# Altium PCB Power Converter PCB.PcbDoc
Units mm, origin at the board's own origin, x right, y up, seen from the top; angles counter-clockwise.
Board outline 69.34 x 61.34 mm, 2 copper layers (Top Layer, Bottom Layer), stack 0.533 mm thick; 46 components, 20 nets, 117 pads, 16 vias.
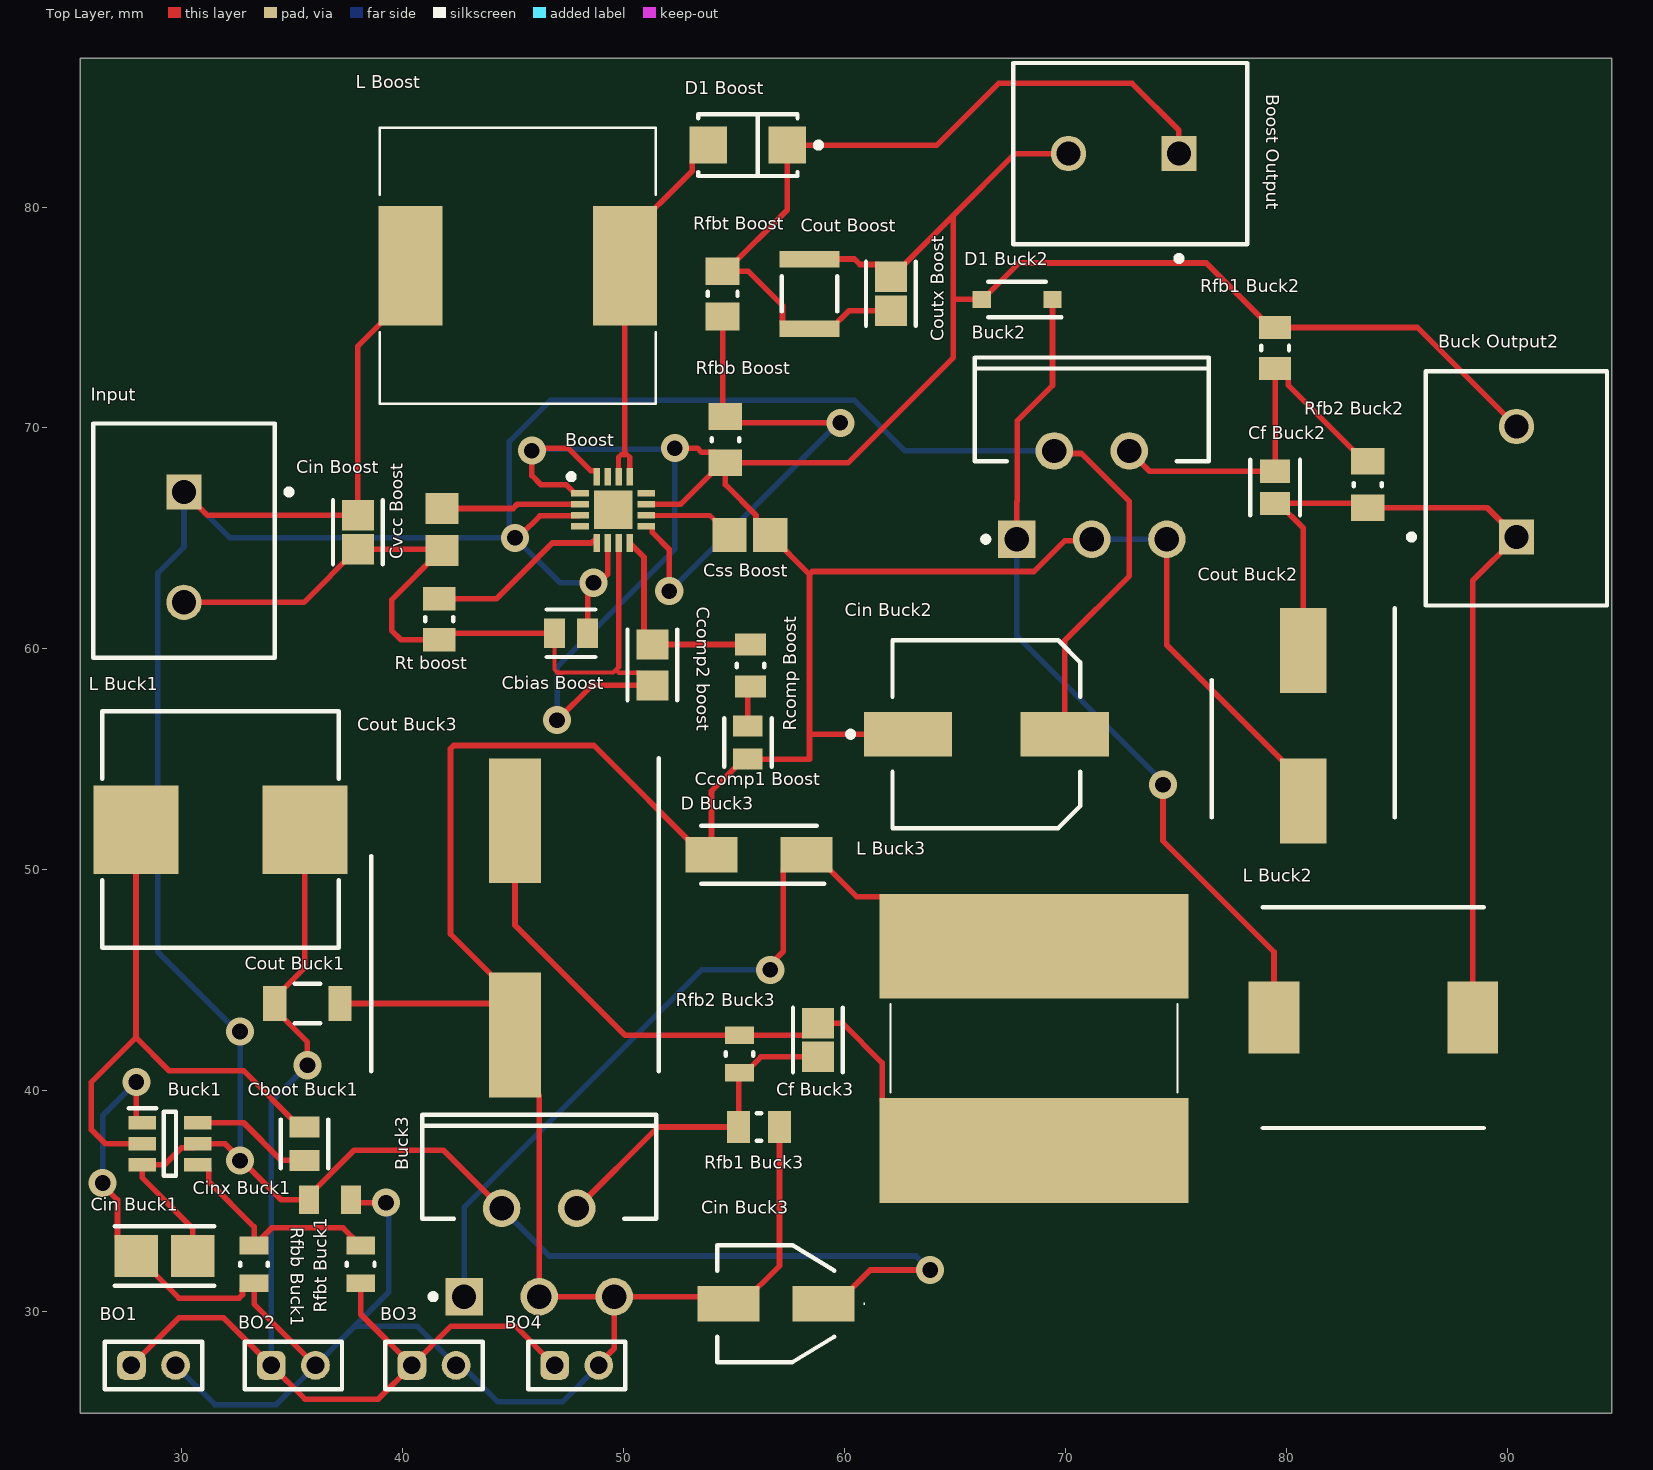
[diagram p0: Top Layer view]
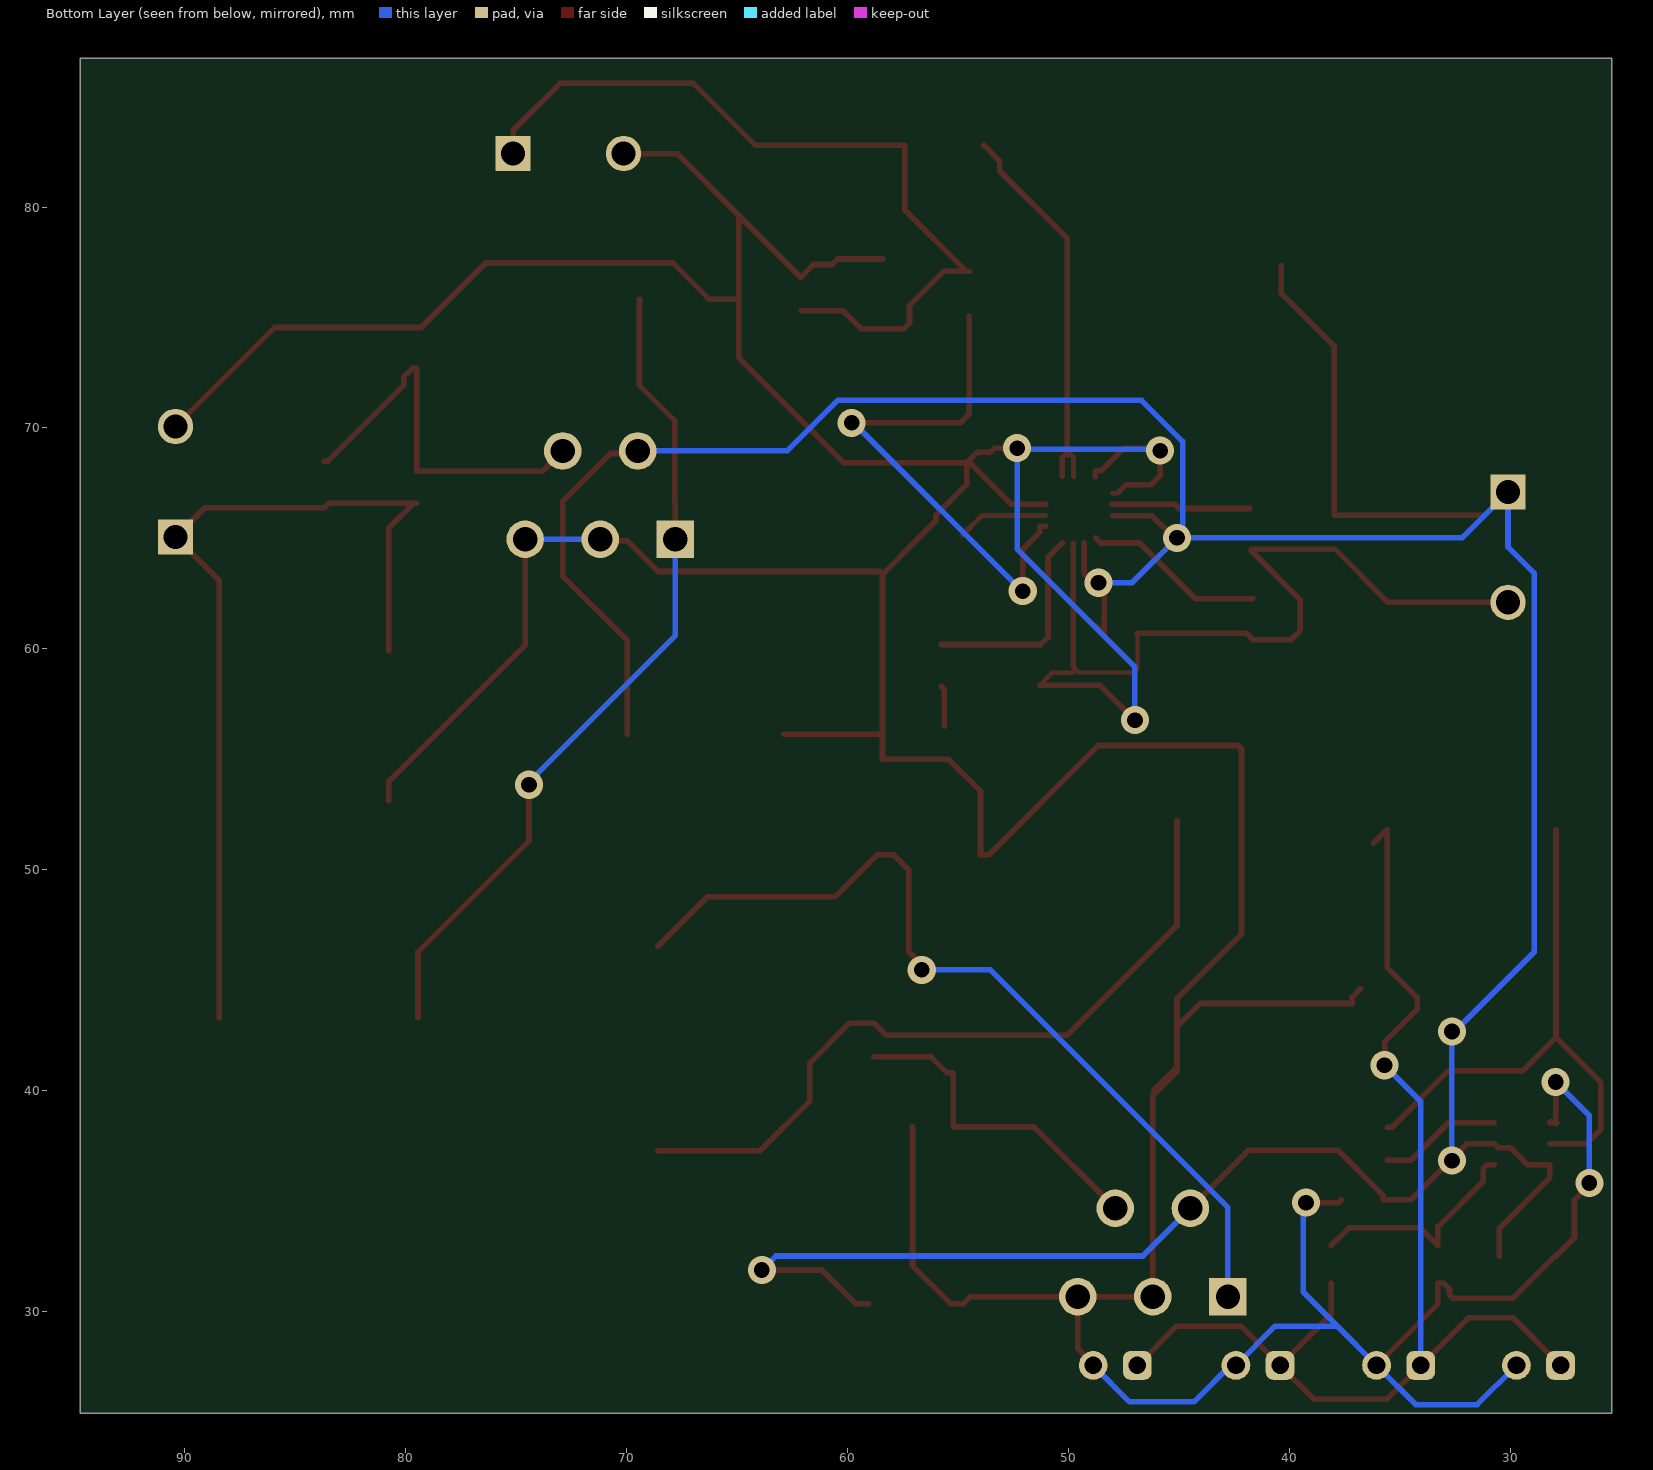
[diagram p1: Bottom Layer view, seen from below]
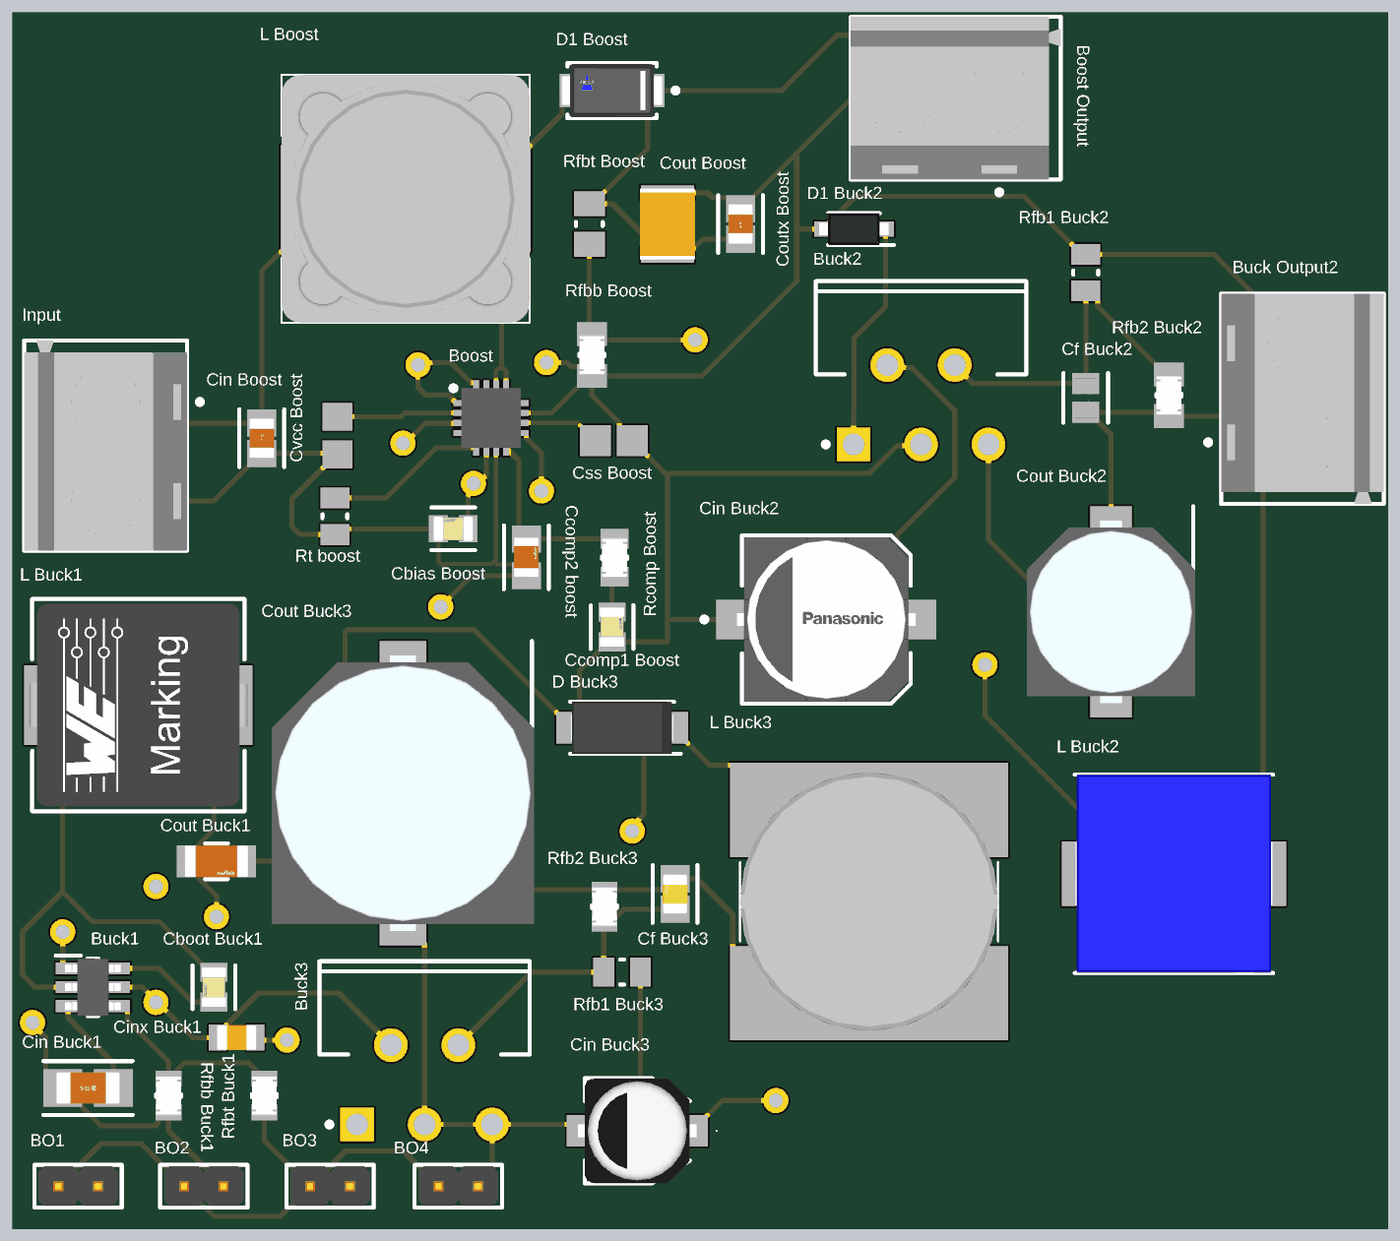
[diagram p2: 3D render of the assembled board from above, using the file's embedded part models]

## Layer stack, top to bottom
Top Solder: solder mask 0.0102, Solder Resist, Dk 3.5
Top Layer: signal copper 0.0356
Dielectric 2: prepreg 0.0711, PP-006, Dk 4.1
Dielectric 1: dielectric 0.32, FR-4, Dk 4.8
Dielectric 3: prepreg 0.0711, PP-006, Dk 4.1
Bottom Layer: signal copper 0.0356
Bottom Solder: solder mask 0.0102, Solder Resist, Dk 3.5

## Board outline
25.4,25.4 94.742,25.4 94.742,86.741 25.4,86.741

## Design rules (kind name [scope] priority, off if disabled: settings)
Clearance [All] p1: gap=0.254 ignorepadtopadclearanceinfootprint=FALSE except(0: Arc-Hole Track-Hole SMDPad-Hole THPad-Hole Via-Hole Fill-Hole Poly-Hole Region-Hole Text-Hole; 0.13: Arc-SMDPad Track-SMDPad SMDPad-SMDPad)
PolygonConnect [All] p1: connectstyle=Relief reliefconductorwidth=0.254 reliefentries=4 polygonreliefangle="90 Angle" airgapwidth=0.254
RoutingVias [All] p1: holewidth=0.711 width=1.27 viastyle="Through Hole" minholewidth=0.711 minwidth=1.27 maxholewidth=0.711 maxwidth=1.27
SolderMaskExpansion [All] p1: expansion=0.102 istentingtop=FALSE
Width [All] p1: maxlimit=0.254 minlimit=0.2 preferedwidth=0.254
30 further rules are at their usual default settings.

## Components (designator, comment, footprint, x,y, rotation, side; value= is the part's Value field where it differs from the comment)
BO1 "62000211121" 62000211121 28.718,27.559 r0 top
BO2 "62000211121" 62000211121 35.052,27.559 r0 top
BO3 "62000211121" 62000211121 41.418,27.559 r0 top
BO4 "62000211121" 62000211121 47.879,27.559 r0 top
Boost "LM5158RTER" QFN50P300X300X80-17N-D 49.53,66.294 r0 top
"Boost Output" "282836-2" TECO-282836-2_V 72.644,82.423 r180 top
Buck1 "LMR51420XFDDCR" SOT95P280X110-6N 29.464,37.592 r0 top
Buck2 "" NDH0005A 71.198,66.961 r0 top
Buck3 "" NDH0005A 46.179,32.671 r0 top
"Buck Output2" "282836-2" TECO-282836-2_V 90.424,67.564 r90 top
"Cbias Boost" "C0805C104M5RACTU" FP-C0805C-DN-MFG 47.625,60.706 r0 top value="0.10 μF"
"Cboot Buck1" "C0805C104K3RACTU" FP-C0805C-DN-MFG 35.56,37.592 r90 top value="0.10 μF"
"Ccomp1 Boost" "C0805C223K5RACTU" FP-C0805C-DN-MFG 55.626,55.753 r270 top value="22,000 pF"
"Ccomp2 boost" "GRM2165C2A222JA01D" FP-GRM216-0_1-IPC_A 51.308,59.271 r90 top
"Cf Buck2" "CL21C222JBFNNNE" FP-CL21-IPC_C 79.502,67.31 r270 top
"Cf Buck3" "C2012C0G1H122J060AA" FP-C2012-060-0_2-IPC_B 58.801,42.291 r90 top
"Cin Boost" "C2012X5R1H475K125AB" FP-C2012-125-0_2-IPC_B 37.973,65.276 r270 top
"Cin Buck1" "C3216X7R1H335K160AC" FP-C3216-160-0_2-IPC_A 29.216,32.512 r180 top
"Cin Buck2" "EEE-FK1H101GP" FP-FKF-MFG 66.427,56.134 r0 top
"Cin Buck3" "EEH-ZA1H100R" EEHZA1H100R 56.896,30.353 r180 top
"Cinx Buck1" "885012207098" WCAP-CSGP_0805_L2W1.25H0.8_Reflow 36.703,35.052 r180 top
"Cout Boost" "C3225X7R2A225K230AB" CAPC3225X250X20LL40 58.42,76.073 r270 top
"Cout Buck1" "GRM31CR61A476KE15L" FP-GRM31C-0_2-e0_3_0_8-MFG 35.687,43.942 r0 top
"Cout Buck2" "EMVH100ADA221MHA0G" CAPAE830X1050N 80.772,56.515 r270 top
"Cout Buck3" "EMVH500ARA221MKE0S" CAPAE1300X1400N 45.085,47.371 r270 top
"Coutx Boost" "C2012X7R2A104K125AA" FP-C2012-125-0_2-IPC_B 62.103,76.073 r90 top
"Css Boost" "08055C123KAT2A" CAPC2013X94X50ML20T25 55.717,65.151 r0 top
"Cvcc Boost" "GRM21BR71C225KA12L" CAPC2013X135X50ML10T20 41.783,65.405 r90 top
"D1 Boost" "VS-10MQ100NTRPBF" FP-95400-MFG 55.626,82.804 r180 top value=38pF
"D1 Buck2" "PMEG6010CEH,115" SODFL3516X120N 67.818,75.819 r180 top
"D Buck3" "SK220ATR" DIOM5226X295N 56.134,50.673 r180 top
Input "282836-2" TECO-282836-2_V 30.099,64.603 r270 top
"L Boost" "SRR1260-120M" SRR1260120M 45.212,77.343 r0 top
"L Buck1" "7443251000" WE-HCI_1050 31.75,51.816 r90 top
"L Buck2" "SRU1048-331Y" INDPM100100X510N 83.947,43.307 r0 top
"L Buck3" "SDR1307-121KL" SDR1307102KL 68.58,41.91 r180 top
"Rcomp Boost" "CRCW0805887RFKEA" FP-CRCW0805-e3-IPC_B 55.753,59.247 r270 top
"Rfb1 Buck2" "CRCW08051K00FKEA" RESC2013X50X30NL20T20 79.502,73.624 r270 top
"Rfb1 Buck3" "CRCW08051K00FKEA" RESC2013X50X30NL20T20 56.134,38.354 r180 top
"Rfb2 Buck2" "CRCW08051K69FKEA" FP-CRCW0805-e3-IPC_A 83.693,67.437 r270 top
"Rfb2 Buck3" "CRCW08053K09FKEA" FP-CRCW0805-e3-IPC_C 55.245,41.656 r90 top
"Rfbb Boost" "CRCW08052K49FKEA" FP-CRCW0805-e3-IPC_A 54.61,69.469 r270 top
"Rfbb Buck1" "CRCW080522K1FKEA" FP-CRCW0805-e3-IPC_C 33.274,32.131 r270 top
"Rfbt Boost" "CRCW0805118KFKEA" RESC2013X50X30ML20T20 54.483,76.073 r270 top
"Rfbt Buck1" "CRCW0805162KFKEA" FP-CRCW0805-e3-IPC_C 38.1,32.131 r90 top
"Rt boost" "CRCW08059K76FKEA" RESC2013X50X30NL20T20 41.656,61.341 r270 top

## Footprints (in the part's own frame and the unit in brackets; to place one, negate y for a bottom-side part, rotate by r counter-clockwise, add the part's x,y. Pads: shape width x height; smd on the part's side, far side on the other; paste and mask are expansions set on the pad)
62000211121 [mm] "Pin Header, pitch 2.00 mm, THT, Vertical, single row, 2p"
  rrect50% 1.3x1.3 hole 0.8: 1(-1,0)
  round 1.3 hole 0.8: 2(1,0)
  silkscreen extent -2.2,-1.07 2.2,1.07, body extent -2,-1 2,1, height 6.05
CAPAE830X1050N [mm]
  rect 3.85x2.1 smd: 1(-3.4,0) 2(3.4,0)
  silkscreen extent -5.33,-4.15 4.15,4.15, body extent -4.6,-4.25 4.6,4.25, height 10.5
CAPAE1300X1400N [mm]
  rect 5.65x2.35 smd: 1(-4.85,0) 2(4.85,0)
  silkscreen extent -7.68,-6.5 6.5,6.5, body extent -6.95,-6.6 6.95,6.6, height 14
CAPC2013X94X50ML20T25 [mm] "Chip Capacitor, 2-Leads, Body 2.01x1.25mm, IPC Low Density"
  rect 1.55x1.55 smd: 1(-0.925,0) 2(0.925,0)
  body extent -1.1,-0.72 1.11,0.72, height 0.94
CAPC2013X135X50ML10T20 [mm] "Chip Capacitor, 2-Leads, Body 2.00x1.25mm, IPC Low Density"
  rect 1.4x1.5 smd: 1(-0.95,0) 2(0.95,0)
  body extent -1.05,-0.67 1.05,0.67, height 1.35
CAPC3225X250X20LL40 [mm] "Chip Capacitor, 2-Leads, Body 3.60x2.80mm, IPC High Density"
  rect 0.75x2.7 smd: 1(-1.575,0) 2(1.575,0)
  silkscreen extent -0.8,-1.25 0.8,1.25, body extent -1.8,-1.4 1.8,1.4, height 2.5
DIOM5226X295N [mm]
  rect 2.35x1.6 smd: 1(-2.15,0) 2(2.15,0)
  silkscreen extent -2.95,-1.31 2.61,1.31, body extent -2.62,-1.31 2.62,1.31, height 2.95
EEHZA1H100R [mm]
  rect 2.8x1.6 smd: 1(-2.15,0) 2(2.15,0)
  silkscreen extent -4.03,-2.65 2.65,2.65, body extent -3,-2.65 3,2.65, height 5.8
FP-95400-MFG [mm]
  rect 1.7x1.68 smd paste+0 mask+0: 1(-1.79,0) 2(1.79,0)
  silkscreen extent -3.33,-1.4 2.25,1.4, body extent -2.74,-1.5 2.74,1.5, height 0.25
FP-C0805C-DN-MFG [mm]
  rect 0.95x1.35 smd paste+0 mask+0: 1(-0.75,0) 2(0.75,0)
  silkscreen extent -1.1,-1.07 1.1,1.07, body extent -1.4,-0.85 1.4,0.85, height 0.25
FP-C2012-060-0_2-IPC_B [mm]
  rect 1.378x1.456 smd paste+0 mask+0: 1(-0.764,0) 2(0.764,0)
  silkscreen extent -1.45,-1.13 1.45,1.13, body extent -1.7,-0.98 1.7,0.98, height 0.25
FP-C2012-125-0_2-IPC_B [mm]
  rect 1.378x1.456 smd paste+0 mask+0: 1(-0.764,0) 2(0.764,0)
  silkscreen extent -1.45,-1.13 1.45,1.13, body extent -1.7,-0.98 1.7,0.98, height 0.25
FP-C3216-160-0_2-IPC_A [mm]
  rect 1.954x1.906 smd paste+0 mask+0: 1(-1.276,0) 2(1.276,0)
  silkscreen extent -2.25,-1.35 2.25,1.35, body extent -2.75,-1.45 2.75,1.45, height 0.25
FP-CL21-IPC_C [mm]
  rect 1.055x1.356 smd paste+0 mask+0: 1(-0.726,0) 2(0.726,0)
  silkscreen extent -1.25,-1.12 1.25,1.12, body extent -1.35,-0.82 1.35,0.82, height 0.25
FP-CRCW0805-e3-IPC_A [mil]
  rect 47.5x59.38 smd paste+0 mask+0: 1(-41.37,0) 2(41.37,0)
  silkscreen extent -3,-25 3,25, body extent -85,-49 85,49, height 10
FP-CRCW0805-e3-IPC_B [mm]
  rect 1.007x1.408 smd paste+0 mask+0: 1(-0.951,0) 2(0.951,0)
  silkscreen extent -0.07,-0.62 0.07,0.62, body extent -1.7,-0.95 1.7,0.95, height 0.25
FP-CRCW0805-e3-IPC_C [mil]
  rect 31.75x51.5 smd paste+0 mask+0: 1(-33.5,0) 2(33.5,0)
  silkscreen extent -3,-25 3,25, body extent -53,-31 53,31, height 10
FP-FKF-MFG [mm]
  rect 4x2 smd paste+0 mask+0: 1(-3.55,0) 2(3.55,0)
  silkscreen extent -6.27,-4.25 4.25,4.25, body extent -5.8,-4.5 5.8,4.5, height 0.25
FP-GRM31C-0_2-e0_3_0_8-MFG [mm]
  rect 1.05x1.6 smd paste+0 mask+0: 1(-1.475,0) 2(1.475,0)
  silkscreen extent -0.58,-0.9 0.58,0.9, body extent -2.1,-1 2.1,1, height 0.25
FP-GRM216-0_1-IPC_A [mm]
  rect 1.358x1.461 smd paste+0 mask+0: 1(-0.927,0) 2(0.927,0)
  silkscreen extent -1.61,-1.13 1.61,1.13, body extent -2.11,-1.23 2.11,1.23, height 0.25
INDPM100100X510N [mm]
  rect 2.3x3.25 smd: 1(-4.5,0) 2(4.5,0)
  silkscreen extent -5,-5 5,5, body extent -5,-5 5,5, height 5.1
NDH0005A [mm] "FM, 5-Leads, Body 10.6x4.7mm, Pitch 1.7mm"
  rect 1.7x1.7 hole 1.1: 1(-3.4,-2)
  round 1.7 hole 1.1: 2(-1.7,2) 3(0,-2) 4(1.7,2) 5(3.4,-2)
  silkscreen extent -5.3,-2.12 5.3,6.23, body extent -5.35,-2.31 5.35,6.28, height 21.1
QFN50P300X300X80-17N-D [mm]
  rect 0.8x0.3 smd: 1(-1.5,0.75) 2(-1.5,0.25) 3(-1.5,-0.25) 4(-1.5,-0.75) 9(1.5,-0.75) 10(1.5,-0.25) 11(1.5,0.25) 12(1.5,0.75)
  rect 0.3x0.8 smd: 5(-0.75,-1.5) 6(-0.25,-1.5) 7(0.25,-1.5) 8(0.75,-1.5) 13(0.75,1.5) 14(0.25,1.5) 15(-0.25,1.5) 16(-0.75,1.5)
  rect 1.75x1.75 smd: 17(0,0)
  silkscreen extent -2.02,1.38 -1.77,1.62, body extent -1.5,-1.5 1.5,1.5, height 0.8
RESC2013X50X30ML20T20 [mm] "Chip Resistor, 2-Leads, Body 2.00x1.25mm, IPC Low Density"
  rect 1.25x1.55 smd: 1(-1.025,0) 2(1.025,0)
  silkscreen extent -0.1,-0.67 0.1,0.67, body extent -1.1,-0.72 1.1,0.72, height 0.5
RESC2013X50X30NL20T20 [mm] "Chip Resistor, 2-Leads, Body 2.00x1.25mm, IPC Medium Density"
  rect 1.05x1.45 smd: 1(-0.925,0) 2(0.925,0)
  silkscreen extent -0.1,-0.63 0.1,0.63, body extent -1.1,-0.72 1.1,0.72, height 0.5
SDR1307102KL [mm]
  rect 14x4.75 smd: 1(0,-4.625) 2(0,4.625)
  silkscreen extent -6.5,-2 6.5,2, body extent -6.5,-6.5 6.5,6.5, height 7
SODFL3516X120N [mm]
  rect 0.82x0.76 smd: 1(-1.6,0) 2(1.6,0)
  silkscreen extent -2.01,-0.8 1.3,0.8, body extent -1.75,-0.8 1.75,0.8, height 1.1
SOT95P280X110-6N [mm]
  rect 1.25x0.6 smd: 1(-1.25,0.95) 2(-1.25,0) 3(-1.25,-0.95) 4(1.25,-0.95) 5(1.25,0) 6(1.25,0.95)
  silkscreen extent -1.87,-1.45 0.27,1.6, body extent -1.4,-1.45 1.4,1.45, height 0.97
SRR1260120M [mm]
  rect 2.9x5.4 smd: 1(-4.85,0) 2(4.85,0)
  silkscreen extent -6.25,-6.25 6.25,6.25, body extent -6.25,-6.25 6.25,6.25, height 6
TECO-282836-2_V [mm] "Female Header, Pitch 5mm, 1 x 2 Position, Height 10mm"
  rect 1.6x1.6 hole 1.1: 1(-2.5,0)
  round 1.6 hole 1.1: 2(2.5,0)
  silkscreen extent -5.6,-4.1 5,4.87, body extent -5.6,-4.1 5,4.1, height 10
WCAP-CSGP_0805_L2W1.25H0.8_Reflow [mm] "Ceramic Capacitors, body 2x1.25mm"
  rect 0.9x1.3 smd: 1(-0.95,0) 2(0.95,0)
  body extent -1,-0.62 1,0.63, height 0.8
WE-HCI_1050 [mm] "SMT Flat Wire High Current Inductor, body 10.2x10.2mm"
  rect 4x3.85 smd: 1(0,3.825) 2(0,-3.825)
  silkscreen extent -5.35,-5.35 5.35,5.35, body extent -5.1,-5.5 5.1,5.5, height 5

## Part data
BO1 BO2 BO3 BO4: library part CMP-1502-00956-3, Contact Resistance=20mΩ, Current Rating=2A, Max Operating Temperature=105°C, Min Operating Temperature=-40°C, Operating Supply Voltage=200V, Contact Material=Gold, Gender=Male, Height=6.35mm, Lead Pitch=2mm, NexarPartId=61924778, Number of Contacts=2, Number of Pins=2, Number of Rows=1, Orientation=Vertical, RoHS=Non-Compliant, Voltage Rating=200V
Boost: "Integrated Circuit", Manufacturer_Name="Texas Instruments", Mouser Part Number=595-LM5158RTER, Arrow Part Number=LM5158RTER, Arrow Price/Stock=https://www.arrow.com/en/products/lm5158rter/texas-instruments?region=nac, Datasheet Link=https://www.ti.com/lit/ds/symlink/lm51581.pdf?HQS=dis-dk-null-digikeymode-dsf-pf-null-wwe&ts=1701945457348, Height=0.8mm, Manufacturer_Part_Number=LM5158RTER, Mouser Price/Stock=https://www.mouser.co.uk/ProductDetail/Texas-Instruments/LM5158RTER?qs=A6eO%252BMLsxmSi4gKDMJ7mCQ%3D%3D
"Boost Output" "Buck Output2" Input: library part CMP-1684-00017-1, "Female Header, Pitch 5 mm, 1 x 2 Position, Height 10 mm, Tail Length 3.5 mm, Rohs, Bulk", Color=Green, Current=13.5A, Manufacturer="TE Connectivity", Package Description="Female Header, Pitch 5 mm, 1 x 2 Position, Height 10 mm, Tail Length 3.5 mm", Package Reference=THD, Standard Package=300, Voltage=300V, 3D Model=282836-2.pdf, Category=Connectors,Interconnects, Clamp Material - Plating=Brass-NickelPlated, Contact Material - Plating=Brass-TinPlated, Datasheet URL=http://www.te.com.cn/commerce/DocumentDelivery/DDEController?Action=showdoc&DocId=Catalog+Section%7F1308389_EUROSTYLE_TERMINAL_BLOCKS%7F0607%7Fpdf%7FEnglish%7FENG_CS_1308389_EUROSTYLE_TERMINAL_BLOCKS_0607.pdf%7F282836-2, Dynamic Catalog=BuchananSeries, Family=TerminalBlocks-WiretoBoard, Featured Product=EurostyleTerminalBlockConnectors, Features=Interlocking(Side), Housing Material=Polyamide(PA66),Nylon6/6, Manufacturer URL=http://www.te.com, Mating Orientation=HorizontalwithBoard, Mounting Type=ThroughHole, Number of Levels=1, Other Names="5ULV-02B / A98076", Packaging=Bulk, Pitch="0.197\"(5.00mm)", Positions Per Level=2, Product Training Modules=Wire-to-BoardEurostyleTerminalBlocks, RoHS Information=282836-2StatementofCompliance, Screw Material - Plating=Brass-NickelPlated, Screw Thread=M3, Series=Buchanan, Torque - Screw=0.68Nm(6Lb-In), Wire Gauge=16-30AWG, Wire Termination=Screw-RisingCageClamp
Buck1: "Integrated Circuit", Manufacturer_Name="Texas Instruments", Mouser Part Number=595-LMR51420XFDDCR, Arrow Part Number=LMR51420XFDDCR, Arrow Price/Stock=https://www.arrow.com/en/products/lmr51420xfddcr/texas-instruments?region=nac, Datasheet Link=https://www.ti.com/lit/ds/symlink/lmr51420.pdf?ts=1662461097045&ref_url=https%253A%252F%252Fwww.ti.com%252Fproduct%252FLMR51420%252Fpart-details%252FLMR51420XFDDCR, Height=1.1mm, Manufacturer_Part_Number=LMR51420XFDDCR, Mouser Price/Stock=https://www.mouser.co.uk/ProductDetail/Texas-Instruments/LMR51420XFDDCR?qs=vvQtp7zwQdMiXKT41134nA%3D%3D
Buck2 Buck3: library part CMP-0069-01920-3, "SIMPLE SWITCHER® Power Converter 150 KHz 1A Step-Down Voltage Regulator, 5-pin TO-220, Pb-Free", Manufacturer="Texas Instruments", PackageTopMarking="NSUZXYTTE#*LM2595T*-ADJ P+", PowerWise=N, ComponentLink1Description="Datasheet URL", ComponentLink1URL=http://www.ti.com/general/docs/lit/getliterature.tsp?genericPartNumber=LM2595&fileType=pdf, CompType=Switcher, PackageDescription="TO-220, Molded, Stagger Bend, 5 Lead", PackageReference=NDH0005A, PinCount=5, RoHS=Y
"Cbias Boost": library part CMP-1036-04423-3, "CAP CER 0.1UF 50V X7R 0805", Capacitance="0.10 μF", Manufacturer=KEMET, Package=C0805C-DN, Temperature="-55°C to +125°C", Temperature Characteristic=X7R, Temperature Coefficient=30ppm/°C, Temperature Range High=+125°C, Temperature Range Low=-55°C, Tolerance=0.2, Voltage Rating="50 V", Automotive=No, Category=Cap, ComponentLink2Description=Datasheet, ComponentLink2URL=https://content.kemet.com/datasheets/KEM_C1003_C0G_SMD.pdf, Device Class L1="Passive Components", Device Class L2=Capacitors, Device Class L3="Ceramic Capacitors", Digikey Description="CAP CER 0.1UF 50V X7R 0805", Height=0.88mm, Ipc Land Pattern Name=CAPC200125X78, Lead Free=Yes, Manufacturer Part Number=C0805C104M5RACTU, Material=Ceramic, Mouser Description="Multilayer Ceramic Capacitors MLCC - SMD/SMT 50volts 0.1uF X7R 20%", Octopart=https://octopart.com/c0805c104m5ractu-kemet-129379, RoHS=TRUE
"Cboot Buck1": library part CMP-2007-01100-2, "CAP CER 0.1UF 25V X7R 0805", Capacitance="0.10 μF", Manufacturer=KEMET, Package=C0805C-DN, Temperature="-55°C to +125°C", Temperature Characteristic=X7R, Temperature Coefficient=30ppm/°C, Temperature Range High=+125°C, Temperature Range Low=-55°C, Tolerance=0.1, Voltage Rating="25 V", Automotive=No, Category=Cap, ComponentLink2Description=Datasheet, ComponentLink2URL=https://content.kemet.com/datasheets/KEM_C1003_C0G_SMD.pdf, Device Class L1="Passive Components", Device Class L2=Capacitors, Device Class L3="Ceramic Capacitors", Digikey Description="CAP CER 0.1UF 25V X7R 0805", Height=0.88mm, Ipc Land Pattern Name=CAPC200125X78, Lead Free=Yes, Manufacturer Part Number=C0805C104K3RACTU, Material=Ceramic, Mouser Description="Multilayer Ceramic Capacitor, C Series, 0.1 - F, - 10%, X7R, 25 V, 0805 [2012 Metric] Rohs Compliant: Yes", Octopart=https://octopart.com/c0805c104k3ractu-kemet-136827, RoHS=TRUE
"Ccomp1 Boost": library part CMP-2007-00338-2, "CAP CER 0.022UF 50V X7R 0805", Capacitance="22,000 pF", Manufacturer=KEMET, Package=C0805C-DN, Temperature="-55°C to +125°C", Temperature Characteristic=X7R, Temperature Coefficient=30ppm/°C, Temperature Range High=+125°C, Temperature Range Low=-55°C, Tolerance=0.1, Voltage Rating="50 V", Automotive=No, Category=Cap, ComponentLink2Description=Datasheet, ComponentLink2URL=https://content.kemet.com/datasheets/KEM_C1003_C0G_SMD.pdf, Device Class L1="Passive Components", Device Class L2=Capacitors, Device Class L3="Ceramic Capacitors", Digikey Description="CAP CER 0.022UF 50V X7R 0805", Height=0.88mm, Ipc Land Pattern Name=CAPC200125X78, Lead Free=Yes, Manufacturer Part Number=C0805C223K5RACTU, Material=Ceramic, Mouser Description="Capacitor; Ceramic; Cap; .022uF; Tol 10%; SMT; Vol-Rtg 50V; X7R; Tape and Reel", Octopart=https://octopart.com/c0805c223k5ractu-kemet-145968, RoHS=TRUE
"Ccomp2 boost": library part CMP-1036-03272-5, "Chip Multilayer Ceramic Capacitors for General Purpose, 0805, 2200pF, C0G, 30ppm/°C, 5%, 100V", Capacitance=2.2nF, Case Code (Imperial)=0805, Case Code (Metric)=2012, Dielectric=C0G, Max Operating Temperature=125°C, Min Operating Temperature=-55°C, Package Quantity=4000, Tolerance=5%, Voltage Rating=100V, Case/Package=0805, Construction=Flat, Depth=1.25mm, Height=0.6mm, Length=2mm, Mount="Surface Mount", Packaging="Tape and Reel", Radiation Hardening=No, RoHS Compliant=Yes, Series=GRM, Termination=SMD/SMT, Thickness=0.028inch, Voltage Rating (DC)=100V, Width=0.049inch
"Cf Buck2": library part CMP-13271-001564-1, "CL21 Series 0805 2.2nF 50V ±5% Tolerance C0G Multilayer Ceramic Chip Capacitor", Capacitance=2.2nF, Case Code (Imperial)=0805, Case Code (Metric)=2012, Dielectric=C0G, Max Operating Temperature=125°C, Min Operating Temperature=-55°C, Package Quantity=2000, Tolerance=5%, Voltage=50V, Case/Package=0805, Depth=1.25mm, Height=1.25mm, Lead Free="Lead Free", Length=2mm, Mount="Surface Mount", Packaging="Tape and Reel", Radiation Hardening=No, Thickness=0.053inch, Voltage Rating=50V, Voltage Rating (DC)=50V, Width=0.049inch
"Cf Buck3": library part CMP-08246-006887-1, "Multilayer Ceramic Capacitors 1.2nF ±5% 50V C0G SMD 0805", Capacitance=1.2nF, Case Code (Imperial)=0805, Case Code (Metric)=2012, Dielectric=C0G, Dielectric Material=Ceramic, Max Operating Temperature=125°C, Min Operating Temperature=-55°C, Package Quantity=1, Temperature Coefficient=30ppm/°C, Tolerance=5%, Voltage=50V, Case/Package=0805, Construction=Flat, Depth=1.25mm, Height=0.6mm, Lead Free="Lead Free", Length=2mm, Mount="Surface Mount", Packaging="Tape and Reel", Radiation Hardening=No, REACH SVHC="No SVHC", RoHS Compliant=Yes, Series=C, Termination=SMD/SMT, Thickness=0.028inch, Voltage Rating=50V, Voltage Rating (DC)=50V, Weight=0.000194oz, Width=0.049inch
"Cin Boost": library part CMP-08246-000007-2, "Multilayer Ceramic Capacitors 4.7μF ±10% 50V X5R SMD 0805", Capacitance=4.7uF, Case Code (Imperial)=0805, Case Code (Metric)=2012, Dielectric=X5R, Dielectric Material=Ceramic, Max Operating Temperature=85°C, Min Operating Temperature=-55°C, Package Quantity=1, Tolerance=10%, Voltage=50V, Case/Package=0805, Construction=Flat, Depth=1.25mm, Height=1.25mm, Lead Free="Lead Free", Length=2mm, Mount="Surface Mount", Packaging="Tape and Reel", Radiation Hardening=No, REACH SVHC="No SVHC", Resistor Type=Ceramic, Series=C, Termination=SMD/SMT, Thickness=0.057inch, Voltage Rating=50V, Voltage Rating (DC)=50V, Weight=0.000194oz, Width=0.049inch
"Cin Buck1": library part CMP-08246-006965-1, "Multilayer Ceramic Capacitors 3.3uF ±10% 50V X7R SMD 1206", Capacitance=3.3uF, Case Code (Imperial)=1206, Case Code (Metric)=3216, Dielectric=X7R, Dielectric Material=Ceramic, Max Operating Temperature=125°C, Min Operating Temperature=-55°C, Package Quantity=1, Tolerance=10%, Voltage Rating=50V, Case/Package=1206, Construction=Flat, Depth=1.6mm, Height=1.6mm, Lead Free="Lead Free", Length=3.2mm, Mount="Surface Mount", Packaging="Tape and Reel", Radiation Hardening=No, REACH SVHC="No SVHC", Resistor Type=Ceramic, RoHS Compliant=Yes, Series=C, Termination=SMD/SMT, Thickness=0.051inch, Voltage Rating (DC)=50V, Weight=0.000571oz, Width=1.6mm
"Cin Buck2": library part CMP-05427-000032-1, "CAP ALUM 100UF 20% 50V SMD", Capacitance=100uF, Case/Package=SMD/SMT, ESR (Equivalent Series Resistance)=340mR, Leakage Current=10mA, Max Operating Temperature=105°C, Min Operating Temperature=-55°C, Package Quantity=1, Ripple Current=350mA, Tolerance=20%, Voltage=50V, Construction=Cylindrical, Contact Plating=Tin, Diameter=8mm, Height=10.2mm, Height - Seated (Max)=0.402inch, Impedance=340mR, Lead Free="Lead Free", Length=10.2mm, Life (Hours)=5000Hour, Mount="Surface Mount", Number of Pins=2, Packaging="Tape and Reel", Radiation Hardening=No, REACH SVHC="No SVHC", Ripple Current (AC)=350mA, RoHS Compliant=Yes, Series=FK, Termination=SMD/SMT, Voltage Rating=50V, Voltage Rating (DC)=50V, Width=10mm
"Cin Buck3": "Capacitor Polarised", Manufacturer_Name=Panasonic, Mouser Part Number=667-EEH-ZA1H100R, Arrow Part Number=EEH-ZA1H100R, Arrow Price/Stock=https://www.arrow.com/en/products/eehza1h100r/panasonic, Datasheet Link=http://industrial.panasonic.com/cdbs/www-data/pdf/RDD0000/ABA0000C1221.pdf, Height=6.1mm, Manufacturer_Part_Number=EEH-ZA1H100R, Mouser Price/Stock=https://www.mouser.co.uk/ProductDetail/Panasonic/EEH-ZA1H100R?qs=7UCyOFMWVHYLkHnrAgGq6g%3D%3D
"Cinx Buck1": library part CMP-03913-65419869-1, "885012207098 Ceramic Capacitor, Multilayer, Ceramic, 50V, 10% +Tol, 10% -Tol, X7R, 15% TC, 0.1uF, Surface Mount, 0805", Capacitance=100nF, Case Code (Imperial)=0805, Case Code (Metric)=2012, Dielectric=X7R, Insulation Resistance=5GΩ, Max Operating Temperature=125°C, Min Operating Temperature=-55°C, Tolerance=10%, Voltage Rating=50V, Case/Package=0805, Height=800µm, Length=2mm, Material=Ceramic, Mount="Surface Mount", NexarPartId=65419869, Packaging="Tape & Reel (TR)", REACH SVHC=Unknown, RoHS=Compliant, Thickness=889µm, Voltage Rating (DC)=50V, Width=1.25mm
"Cout Boost": library part CMP-2000-06053-1, "Chip Capacitor, 2.2 uF, +/- 10%, -55 to 125 degC, 1210 (3225 Metric), RoHS, Tape and Reel", Capacitance=2.2µF, Manufacturer=TDK, Operating Temperature=-55°C~125°C, Package / Case=1210(3225Metric), Package Description="2-Pin Surface Mount Device, Body 3.2 x 2.5 mm", Package Reference="1210 (3225 Metric)", PCN Part Number=MLCCPartNumberChange30/Nov/2012, Ratings=-, Standard Package=1, Temperature Coefficient=X7R, Tolerance=±10%, Voltage - Rated=100V, Applications=GeneralPurpose, Catalog Drawings=CSERIES_1210_2.5, Category=Capacitors, Datasheet URL=https://datasheet.ciiva.com/15192/getdatasheetpartid-725361-15192330.pdf, Datasheet Version=10/2014, Family=CeramicCapacitors, Featured Product=C-SeriesMidVoltageMLCCs, Features=-, Height - Seated (Max)=-, Lead Spacing=-, Lead Style=-, Manufacturer URL=http://www.tdk.com/, Mounting Technology=SurfaceMount, Mounting Type=SurfaceMount,MLCC, Online Catalog=CSeries,MidVoltage, Other Names=445-4497-6, Packaging=Digi-Reel®, Product Training Modules=SEAT,CCV,andTVCLDesignToolsGuidetoReplacinganElectrolyticCapacitorwithanMLCC, RoHS Information=RoHSCertificate-MLCC, Series=C, Size / Dimension="0.126\"Lx0.098\"W(3.20mmx2.50mm)", Thickness (Max)="0.098\"(2.50mm)"
"Cout Buck1": library part CMP-06035-015661-1, "Chip Multilayer Ceramic Capacitors for General Purpose, 1206, 47uF, X5R, 15%, 10%, 10V", Capacitance=47uF, Case Code (Imperial)=1206, Case Code (Metric)=3216, Dielectric=X5R, Max Operating Temperature=85°C, Min Operating Temperature=-55°C, Package Quantity=2000, Tolerance=10%, Voltage=10V, Case/Package=1206, Depth=1.6mm, Height=1.6mm, Lead Free="Lead Free", Length=3.2mm, Material=Ceramic, Mount="Surface Mount", Packaging="Tape and Reel", REACH SVHC="No SVHC", Termination=SMD/SMT, Thickness=0.071inch, Voltage Rating=10V, Voltage Rating (DC)=10V, Width=1.6mm
"Cout Buck2": "Capacitor", Manufacturer_Name=Chemi-Con, Datasheet Link=https://www.mouser.com/datasheet/2/420/MVHRA_e-2509159.pdf, Height=10.5mm, Manufacturer_Part_Number=EMVH100ADA221MHA0G
"Cout Buck3": "Capacitor Polarised", Manufacturer_Name=Chemi-Con, Mouser Part Number=661-MVH50V221M, Datasheet Link=https://datasheet.datasheetarchive.com/originals/distributors/Datasheets_SAMA/00faa400e29ccc6bfe274dba95f85cbe.pdf, Height=14mm, Manufacturer_Part_Number=EMVH500ARA221MKE0S, Mouser Price/Stock=https://www.mouser.co.uk/ProductDetail/Chemi-Con/EMVH500ARA221MKE0S?qs=2mc6vmdPgIHrG5zINcyyrQ%3D%3D
"Coutx Boost": library part CMP-08246-005364-1, "Multilayer Ceramic Capacitors 100nF ±10% 100V X7R SMD 0805", Capacitance=100nF, Case Code (Imperial)=0805, Case Code (Metric)=2012, Dielectric=X7R, Max Operating Temperature=125°C, Min Operating Temperature=-55°C, Package Quantity=1, Resistor Type=Ceramic, Tolerance=10%, Voltage=100V, Case/Package=0805, Construction=Flat, Depth=1.25mm, Height=1.25mm, Lead Free="Lead Free", Length=2mm, Mount="Surface Mount", Number of Pins=2, Packaging="Tape and Reel", Radiation Hardening=No, REACH SVHC="No SVHC", RoHS Compliant=Yes, Series=C, Termination=SMD/SMT, Thickness=0.057inch, Voltage Rating=100V, Voltage Rating (DC)=100V, Weight=0.000194oz, Width=0.049inch
"Css Boost": library part CMP-2007-04376-1, Manufacturer="AVX Interconnect / Elco", Part Number=08055C123KAT2A
"Cvcc Boost": library part CMP-2007-03455-1, Manufacturer=Murata, Part Number=GRM21BR71C225KA12L
"D1 Boost": library part CMP-02539-000001-1, "DIODE SCHOTTKY 100V 1A SMA", Capacitance=38pF, Forward Current=1.5A, Manufacturer=Vishay, Max Junction Temp=+150°C, Max Repetitive Reverse Voltage=100V, Max Surge Forward Current=30A, Package=95400, Peak Reverse Current=0.1mA, Temperature="-55°C to +150°C", Temperature Range Low=-55°C, Automotive=No, Category=Diode, ComponentLink2Description=Datasheet, ComponentLink2URL=http://www.vishay.com/docs/94119/vs-10mq100ntrpbf.pdf, Device Class L1="Discrete Semiconductors", Device Class L2=Diodes, Device Class L3="Schottky Diodes", Digikey Description="DIODE SCHOTTKY 100V 1A SMA", Footprint Url=https://www.vishay.com/docs/95400/sma.pdf, Height=2.29mm, Lead Free=Yes, Manufacturer Part Number=VS-10MQ100NTRPBF, Mouser Description="DIODE SCHOTTKY 100V 1A SMA", Octopart=https://octopart.com/vs-10mq100ntrpbf-vishay-44340924, Reverse Voltage=100V, RoHS=TRUE, Standoff Height=0mm, Temperature Range High=+150°C
"D1 Buck2": "Diode", Manufacturer_Name=Nexperia, Mouser Part Number=771-PMEG6010CEH-T/R, Arrow Part Number=PMEG6010CEH,115, Arrow Price/Stock=https://www.arrow.com/en/products/pmeg6010ceh115/nexperia?region=europe, Datasheet Link=https://assets.nexperia.com/documents/data-sheet/PMEG6010CEH_PMEG6010CEJ.pdf, Height=1.2mm, Manufacturer_Part_Number=PMEG6010CEH,115, Mouser Price/Stock=https://www.mouser.co.uk/ProductDetail/Nexperia/PMEG6010CEH115?qs=LOCUfHb8d9uyulDQGIpcOA%3D%3D
"D Buck3": "Diode", Manufacturer_Name="SMC Diode Solutions", Datasheet Link=http://www.smc-diodes.com/propdf/SK220A%20N0942%20REV.B.pdf, Height=2.95mm, Manufacturer_Part_Number=SK220ATR
"L Boost": "Inductor", Manufacturer_Name=Bourns, Mouser Part Number=652-SRR1260-120M, Arrow Part Number=SRR1260-120M, Arrow Price/Stock=https://www.arrow.com/en/products/srr1260-120m/bourns?region=nac, Datasheet Link=https://www.bourns.com/docs/Product-Datasheets/SRR1260.pdf, Height=6.5mm, Manufacturer_Part_Number=SRR1260-120M, Mouser Price/Stock=https://www.mouser.co.uk/ProductDetail/Bourns/SRR1260-120M?qs=%2FPiZ59IM4y1THIjATaheJA%3D%3D
"L Buck1": library part CMP-03913-24533220-1, "7443251000 Power Choke Shielded Wirewound 10uH/7.6uH 20% 100KHz 7.2A 16.3mOhm DCR T/R", Ambient Temperature Range High=100°C, Ambient Temperature Range Low=-40°C, Case/Package=Nonstandard, Current Rating=7.2A, DC Resistance (DCR)=16.3mΩ, Inductance=10µH, Inductance Tolerance=20%, Max Operating Temperature=150°C, Saturation Current=8.5A, Self Resonant Frequency=21MHz, Series Resistance=16.3Ω, Test Frequency=100kHz, Composition=Wirewound, Height=4.7mm, Height - Seated (Max)=5.0038mm, Lead Free="Lead Free", Length=10.5mm, Max DC Current=7.2A, Min Operating Temperature=-40°C, Mount="Surface Mount", NexarPartId=24533220, Number of Pins=2, Packaging=Digi-Reel®, REACH SVHC=Unknown, RMS Current (Irms)=7.2A, RoHS=Compliant, Shielding=Shielded, Termination=SMD/SMT, Tolerance=20%, Width=10.2mm
"L Buck2": "Inductor", Manufacturer_Name=Bourns, Datasheet Link=http://uk.rs-online.com/web/p/products/1729735, Height=5.1mm, Manufacturer_Part_Number=SRU1048-331Y
"L Buck3": "Inductor", Manufacturer_Name=Bourns, Mouser Part Number=652-SDR1307-121KL, Arrow Part Number=SDR1307-121KL, Arrow Price/Stock=https://www.arrow.com/en/products/sdr1307-121kl/bourns, Datasheet Link=https://datasheet.datasheetarchive.com/originals/dk/DKDS-12/225042.pdf, Height=7.3mm, Manufacturer_Part_Number=SDR1307-121KL, Mouser Price/Stock=https://www.mouser.co.uk/ProductDetail/Bourns/SDR1307-121KL?qs=y9m3SKnhpLM5rTTayljzjg%3D%3D
"Rcomp Boost": library part CMP-2001-04145-2, "RES Thick Film, 887Ω, 1%, 0.125W, 100ppm/°C, 0805", Case Code (Imperial)=0805, Case Code (Metric)=2012, Max Operating Temperature=155°C, Max Power Dissipation=125mW, Min Operating Temperature=-55°C, Package Quantity=10, Resistance=887R, Temperature Coefficient=100ppm/°C, Tolerance=1%, Voltage Rating=150V, Case/Package=0805, Composition="Thick Film", Contact Plating=Tin, Depth=1.25mm, Features="Automotive AEC-Q200", Height=0.45mm, Lead Free="Lead Free", Length=2mm, Military Standard=Not, Number of Pins=2, Number of Terminations=2, Packaging="Tape and Reel", Power Rating=125mW, Radiation Hardening=No, Termination=SMD/SMT, Voltage Rating (DC)=150V, Weight=0.000194oz, Width=0.049inch
"Rfb1 Buck2" "Rfb1 Buck3": library part CMP-1013-00510-2, Manufacturer="Vishay Dale", Part Number=CRCW08051K00FKEA
"Rfb2 Buck2": library part CMP-2001-03620-2, "RES Thick Film, 1.69kΩ, 1%, 0.125W, 100ppm/°C, 0805", Case Code (Imperial)=0805, Case Code (Metric)=2012, Max Operating Temperature=155°C, Max Power Dissipation=125mW, Min Operating Temperature=-55°C, Package Quantity=10, Resistance=1.69kR, Temperature Coefficient=100ppm/°C, Tolerance=1%, Voltage Rating=150V, Case/Package=0805, Composition="Thick Film", Contact Plating=Tin, Depth=1.25mm, Features="Automotive AEC-Q200", Height=0.45mm, Lead Free="Lead Free", Length=2mm, Military Standard=Not, Number of Terminations=2, Packaging="Tape and Reel", Power Rating=125mW, Radiation Hardening=No, Termination=SMD/SMT, Voltage Rating (DC)=150V, Weight=0.000194oz, Width=1.25mm
"Rfb2 Buck3": library part CMP-2001-03873-2, "RES Thick Film, 3.09kΩ, 1%, 0.125W, 100ppm/°C, 0805", Case Code (Imperial)=0805, Case Code (Metric)=2012, Max Operating Temperature=155°C, Max Power Dissipation=125mW, Min Operating Temperature=-55°C, Package Quantity=10, Resistance=3.09kR, Temperature Coefficient=100ppm/°C, Tolerance=1%, Voltage Rating=150V, Case/Package=0805, Composition="Thick Film", Contact Plating=Tin, Depth=1.25mm, Features="Automotive AEC-Q200", Height=0.02inch, Lead Free="Lead Free", Length=2mm, Military Standard=Not, Number of Pins=2, Number of Terminations=2, Packaging="Tape and Reel", Power Rating=125mW, Radiation Hardening=No, Termination=Solder, Voltage Rating (DC)=150V, Weight=0.000194oz, Width=0.049inch
"Rfbb Boost": library part CMP-2001-03771-2, "RES Thick Film, 2.49kΩ, 1%, 0.125W, 100ppm/°C, 0805", Case Code (Imperial)=0805, Case Code (Metric)=2012, Max Operating Temperature=155°C, Max Power Dissipation=125mW, Min Operating Temperature=-55°C, Package Quantity=10, Resistance=2.49kR, Temperature Coefficient=100ppm/°C, Tolerance=1%, Voltage Rating=150V, Case/Package=0805, Composition="Thick Film", Contact Plating=Tin, Depth=1.25mm, Features="Automotive AEC-Q200", Height=0.45mm, Lead Free="Lead Free", Length=2mm, Military Standard=Not, Number of Pins=2, Number of Terminations=2, Packaging="Tape and Reel", Power Rating=125mW, Radiation Hardening=No, Termination=SMD/SMT, Voltage Rating (DC)=150V, Weight=0.000194oz, Width=0.049inch
"Rfbb Buck1": library part CMP-2001-03689-2, "RES Thick Film, 22.1kΩ, 1%, 0.125W, 100ppm/°C, 0805", Case Code (Imperial)=0805, Case Code (Metric)=2012, Max Operating Temperature=155°C, Max Power Dissipation=125mW, Min Operating Temperature=-55°C, Package Quantity=10, Resistance=22.1kR, Temperature Coefficient=100ppm/°C, Tolerance=1%, Voltage Rating=150V, Case/Package=0805, Composition="Thick Film", Contact Plating=Tin, Depth=1.25mm, Features="Automotive AEC-Q200", Height=0.45mm, Lead Free="Lead Free", Length=2mm, Military Standard=Not, Number of Terminations=2, Packaging="Tape and Reel", Power Rating=125mW, Radiation Hardening=No, Termination=SMD/SMT, Voltage Rating (DC)=150V, Weight=0.000194oz, Width=1.25mm
"Rfbt Boost": library part CMP-2001-04922-1, Manufacturer="Vishay Dale", Part Number=CRCW0805118KFKEA
"Rfbt Buck1": library part CMP-2001-04975-2, "RES Thick Film, 162kΩ, 1%, 0.125W, 100ppm/°C, 0805", Case Code (Imperial)=0805, Case Code (Metric)=2012, Max Operating Temperature=155°C, Max Power Dissipation=125mW, Min Operating Temperature=-55°C, Package Quantity=10, Resistance=162kR, Temperature Coefficient=100ppm/°C, Tolerance=1%, Voltage Rating=150V, Case/Package=0805, Composition="Thick Film", Contact Plating=Tin, Depth=1.25mm, Features="Automotive AEC-Q200", Height=0.45mm, Lead Free="Lead Free", Length=2mm, Military Standard=Not, Number of Pins=2, Number of Terminations=2, Packaging="Tape and Reel", Power Rating=125mW, Radiation Hardening=No, Termination=SMD/SMT, Voltage Rating (DC)=150V, Weight=0.000194oz, Width=0.049inch
"Rt boost": library part CMP-2001-04181-1, Manufacturer="Vishay Dale", Part Number=CRCW08059K76FKEA

## Via types
v1: diameter 1.27, hole 0.711, Top Layer to Bottom Layer, 16 vias

## Nets (pads, with @x,y where several pads share a name; then routed paths per layer and width w, separated by ;. In a path a pad name is that pad's centre, name@x,y a point inside that pad or via, vN(x,y) a via of type N, cw(c..) or ccw(c..) an arc to the next point about the centre after c; other vN are vias at no path point)
GND: "Boost Output.2" "Buck Output2.2" "Cbias Boost.1" "Ccomp1 Boost.2" "Ccomp2 boost.1" "Cin Boost.2" "Cin Buck1.2" "Cin Buck2.1" "Cin Buck3.2" "Cinx Buck1.1" "Cout Boost.1" "Cout Buck1.2" "Cout Buck2.2" "Cout Buck3.2" "Coutx Boost.2" "Css Boost.2" "Cvcc Boost.1" "D1 Buck2.2" "D Buck3.2" "Rfb1 Buck2.1" "Rfb1 Buck3.1" "Rfbb Boost.2" "Rfbb Buck1.2" "Rt boost.2" BO1.2 BO2.2 BO3.2 BO4.2 Boost.1 Boost.7 Boost.11 Boost.16 Buck1.1 Buck2.3 Buck2.5 Buck3.3 Buck3.5 Input.2 | length 325.2
  Top Layer w0.2: v1(45.847,68.971) v1@45.964,69.088 ; 46.875,60.706 46.875,59.067 47.024,58.918 47.234,58.918 47.244,58.928 49.53,58.928 49.657,59.055 ; Boost.1@47.73,67.096 47.73,67.094 47.78,67.044 Boost.1 ; 49.78,59.178 49.657,59.055 ; 51.308,58.344 50.729,58.923 49.789,58.923 49.657,59.055
  Top Layer w0.234: 49.78,59.178 Boost.7
  Top Layer w0.254: v1(26.416,35.814) 26.416,35.725 27.09,35.051 27.09,33.338 27.916,32.512 27.94,32.512 27.964,32.512 29.869,30.607 32.598,30.607 32.747,30.756 32.747,31.004 33.023,31.28 33.274,31.28 33.274,30.337 BO2.2 ; v1(27.94,40.386) Buck1.1@27.94,38.542 ; Buck1.1@28.148,38.608 Buck1.1 Buck1.1@27.94,38.542 ; Input.2 35.525,62.103 37.934,64.512 37.973,64.512 41.726,64.512 41.726,64.448 39.497,62.219 39.497,60.833 39.914,60.416 41.656,60.416 41.946,60.706 46.875,60.706 ; 36.764,44.615 37.162,44.217 37.162,43.942 44.037,43.942 45.085,42.894 ; 37.653,35.052 37.78,34.925 v1(39.243,34.925) ; v1(45.847,68.971) 45.847,67.84 46.25,67.437 47.389,67.437 Boost.1@47.73,67.096 ; v1@45.964,69.088 47.486,69.088 48.507,68.067 48.757,68.067 48.78,68.044 Boost.16 ; 46.133,40.014 45.085,41.062 ; v1(46.99,56.769) 48.565,58.344 51.308,58.344 ; BO4.2 48.879,27.617 49.579,28.317 Buck3.5 ; Boost.11 52.569,66.544 ccw(c52.568,66.584) 52.597,66.556 54.459,68.418 54.61,68.418 ; v1(52.324,69.088) 53.34,69.088 53.534,68.894 54.134,68.894 54.535,68.494 54.61,68.418 ; 57.059,38.354 57.059,32.066 55.346,30.353 54.746,30.353 54.428,30.671 Buck3.5 ; 58.42,77.648 60.448,77.648 60.697,77.399 61.541,77.399 62.103,76.837 62.142,76.837 64.935,79.63 ; 62.877,56.134 58.42,56.134 ; 70.144,82.423 67.728,82.423 64.935,79.63 ; Buck2.3 71.128,64.891 69.967,64.891 68.576,63.5 58.547,63.5 58.42,63.373 ; Buck2.5 74.598,60.164 80.772,53.99 80.772,53.115 ; 90.424,70.064 85.939,74.549 79.502,74.549 79.302,74.549 76.381,77.47 67.899,77.47 66.248,75.819 66.218,75.819 64.935,75.819 ; Buck1.1@27.94,38.542 27.94,38.491 27.889,38.542 Buck1.1@27.94,38.542 ; 45.085,41.062 45.085,42.521 45.085,42.894 ; 45.085,41.062 45.085,40.871 46.179,39.777 Buck3.3 Buck3.5 ; 45.085,42.894 45.085,44.171 42.164,47.092 42.164,55.477 42.313,55.626 48.656,55.626 53.609,50.673 53.984,50.673 53.984,53.561 55.426,55.003 55.626,55.003 58.42,55.003 58.42,56.134 ; 54.61,68.418 54.61,67.434 55.994,66.05 55.994,65.799 56.642,65.151 58.42,63.373 ; 54.61,68.418 60.163,68.418 64.935,73.19 64.935,75.819 ; 58.42,56.134 58.42,63.373 ; 64.935,75.819 64.935,79.63
  Bottom Layer w0.254: v1(26.416,35.814) 26.416,38.862 v1(27.94,40.386) ; BO1.2 31.496,25.781 34.274,25.781 BO2.2 37.83,29.337 ; v1(39.243,34.925) 39.37,34.798 39.37,30.877 37.83,29.337 ; v1(45.847,68.971) 45.906,69.029 52.265,69.029 v1(52.324,69.088) 52.324,64.516 46.99,59.182 v1(46.99,56.769) ; BO4.2 47.228,25.908 44.323,25.908 42.672,27.559 BO3.2 40.64,29.337 37.83,29.337 ; Buck2.3 Buck2.5
NetBO1_1: "Cout Buck1.1" "L Buck1.2" "Rfbt Buck1.1" BO1.1 BO2.1 BO3.1 BO4.1 | length 55
  Top Layer w0.254: BO1.1 29.877,29.718 31.893,29.718 BO2.1 35.576,26.035 38.894,26.035 BO3.1 ; v1(35.687,41.148) 35.687,42.192 34.212,43.667 34.212,43.942 34.212,44.217 35.575,45.58 35.575,51.816 36.195,51.196 ; 38.1,31.28 38.1,29.877 BO3.1 ; BO4.1 45.101,29.337 42.196,29.337 BO3.1
  Bottom Layer w0.254: BO2.1 34.052,39.513 v1@35.433,40.894
"NetBoost Output_1": "Boost Output.1" "Cout Boost.2" "Coutx Boost.1" "D1 Boost.1" "Rfbt Boost.1" | length 37.2
  Top Layer w0.254: 54.483,77.098 54.633,77.098 ; 62.103,75.309 60.206,75.309 59.395,74.498 58.42,74.498 57.445,74.498 57.197,74.746 57.197,75.54 55.639,77.098 54.633,77.098 ; 75.144,82.423 75.144,83.479 73.025,85.598 66.979,85.598 64.185,82.804 57.416,82.804 57.416,79.881 54.633,77.098
NetBoost_2: "Cvcc Boost.2" Boost.2 | length 6.3
  Top Layer w0.254: 41.783,66.355 44.999,66.355 45.187,66.544 Boost.2
NetBoost_5: "Rt boost.1" Boost.5 | length 8.3
  Top Layer w0.254: 41.656,62.266 44.242,62.266 46.769,64.794 48.538,64.794 Boost.5@48.768,65.024
NetBoost_8: "Ccomp2 boost.2" "Rcomp Boost.1" Boost.8 | length 9.5
  Top Layer w0.254: Boost.8 50.927,64.147 50.927,60.528 51.257,60.198 51.308,60.198 55.753,60.198
NetBoost_9: "Rfbb Boost.1" "Rfbt Boost.2" Boost.9 | length 23.6
  Top Layer w0.254: Boost.9 51.28,65.544 51.303,65.521 51.303,65.271 52.07,64.504 v1@52.07,62.992 ; 54.483,75.048 54.483,70.647 54.61,70.52 54.899,70.231 v1(59.817,70.231)
  Bottom Layer w0.254: v1(52.07,62.611) 52.11,62.611 v1@59.563,70.064
NetBoost_10: "Css Boost.1" Boost.10 | length 4.1
  Top Layer w0.23: Boost.10 53.899,66.044 54.792,65.151
NetBoost_13: "D1 Boost.2" "L Boost.2" Boost.13 Boost.14 | length 18
  Top Layer w0.23: Boost.14 49.78,68.675 49.897,68.792 50.03,68.792 50.163,68.792 50.28,68.675 Boost.13
  Top Layer w0.254: 50.03,68.792 50.062,68.824 50.062,77.343 50.062,78.593 53.113,81.644 53.113,82.091 53.826,82.804 53.836,82.804
NetBuck1_2: "Cboot Buck1.2" "L Buck1.1" Buck1.2 | length 26.3
  Top Layer w0.254: 27.925,51.816 27.925,42.403 ; Buck1.2 26.543,37.592 25.908,38.227 25.908,40.386 27.925,42.403 ; 35.56,38.342 35.36,38.342 32.808,40.894 29.434,40.894 27.925,42.403
NetBuck1_4: "Rfbb Buck1.1" "Rfbt Buck1.2" Buck1.4 | length 10.4
  Top Layer w0.254: Buck1.4 31.039,36.642 31.212,36.469 31.212,35.895 33.274,33.833 33.274,32.982 34.074,33.782 37.3,33.782 38.1,32.982
NetBuck1_6: "Cboot Buck1.1" Buck1.6 | length 5.6
  Top Layer w0.254: Buck1.6 32.804,38.542 34.504,36.842 35.56,36.842
NetBuck2_1: "D1 Buck2.1" "L Buck2.1" Buck2.1 | length 37.7
  Top Layer w0.254: Buck2.1 67.798,66.655 67.818,66.675 67.818,70.32 69.418,71.92 69.418,75.819 ; v1(74.422,53.848) 74.422,51.308 79.447,46.283 79.447,43.307
  Bottom Layer w0.254: Buck2.1 67.798,60.599 v1@74.295,54.102
NetBuck2_4: "Cf Buck2.1" "Rfb1 Buck2.2" "Rfb2 Buck2.1" Buck2.4 | length 17.8
  Top Layer w0.254: Buck2.4 73.823,68.036 79.502,68.036 79.502,72.699 79.702,72.699 80.1,72.301 80.1,71.93 83.542,68.488 83.693,68.488
NetBuck3_1: "D Buck3.1" "L Buck3.1" Buck3.1 | length 41.5
  Top Layer w0.254: v1(56.642,45.466) 56.642,45.715 57.236,46.309 57.236,50 57.909,50.673 58.284,50.673 58.659,50.673 60.549,48.783 66.332,48.783 68.58,46.535
  Bottom Layer w0.254: Buck3.1@43.502,31.394 Buck3.1 42.779,34.712 53.533,45.466 v1(56.642,45.466)
NetBuck3_4: "Cf Buck3.1" "Rfb1 Buck3.2" "Rfb2 Buck3.1" Buck3.4 | length 15.2
  Top Layer w0.254: Buck3.4 51.562,38.354 55.209,38.354 55.209,40.769 55.245,40.805 55.496,40.805 56.218,41.527 58.801,41.527
"NetBuck Output2_1": "Buck Output2.1" "Cf Buck2.2" "Cout Buck2.1" "L Buck2.2" "Rfb2 Buck2.2" | length 41.3
  Top Layer w0.254: 79.502,66.584 79.653,66.584 ; 80.772,59.915 80.772,65.465 79.653,66.584 ; 88.447,43.307 88.447,63.087 90.424,65.064 89.102,66.386 83.693,66.386 83.495,66.584 79.653,66.584
"NetCcomp1 Boost_1": "Ccomp1 Boost.1" "Rcomp Boost.2" | length 1.8
  Top Layer w0.254: 55.626,56.503 55.626,58.169 55.753,58.296
"NetCf Buck3_2": "Cf Buck3.2" "Cout Buck3.1" "L Buck3.2" "Rfb2 Buck3.2" | length 33.9
  Top Layer w0.254: 45.085,52.221 45.085,47.487 50.065,42.507 55.245,42.507 58.253,42.507 58.801,43.055 59.91,43.055 61.707,41.258 61.707,39.533 63.955,37.285 68.58,37.285
Vin: "Cbias Boost.2" "Cin Boost.1" "Cin Buck1.1" "Cin Buck2.2" "Cin Buck3.1" "Cinx Buck1.2" "L Boost.1" Boost.3 Boost.6 Buck1.3 Buck1.5 Buck2.2 Buck3.2 Input.1 | length 178.8
  Top Layer w0.2: Boost.3@47.98,65.994 Boost.3 ; 48.375,60.706 48.75,61.081
  Top Layer w0.25: 49.28,63.377 Boost.6
  Top Layer w0.254: Input.1 31.162,66.04 37.973,66.04 37.973,73.704 40.362,76.093 40.362,77.343 ; 30.492,32.512 30.492,33.77 28.214,36.048 Buck1.3 29.22,36.642 29.997,37.419 30.541,37.419 Buck1.5 31.964,37.592 34.504,35.052 35.753,35.052 35.753,35.252 37.801,37.3 41.85,37.3 Buck3.2 ; v1@45.358,65.17 46.209,66.021 Boost.3@47.98,66.021 ; 48.375,60.706 48.375,62.451 48.641,62.717 v1(48.641,62.992) ; v1@48.75,62.847 49.28,63.377 ; 59.046,30.353 59.646,30.353 61.17,31.877 v1(63.881,31.877) ; Buck2.2 69.615,68.844 70.729,68.844 72.898,66.675 72.898,63.302 69.977,60.381 69.977,56.134
  Bottom Layer w0.254: v1@32.385,42.799 28.918,46.266 28.918,63.431 30.099,64.612 Input.1 32.178,65.024 v1(45.085,65.024) ; v1(32.639,36.83) v1(32.639,42.672) ; Buck3.2 46.638,32.512 63.246,32.512 v1@63.754,32.004 ; v1(48.641,62.992) 47.117,62.992 v1(45.085,65.024) ; Buck2.2 62.738,68.961 60.452,71.247 46.686,71.247 44.831,69.392 44.831,65.553 45.085,65.299 v1(45.085,65.024)
pads on no net: Boost.4 Boost.12 Boost.15 Boost.17